# EAGLE board Ls board v88 (EAGLE 9.7.0)
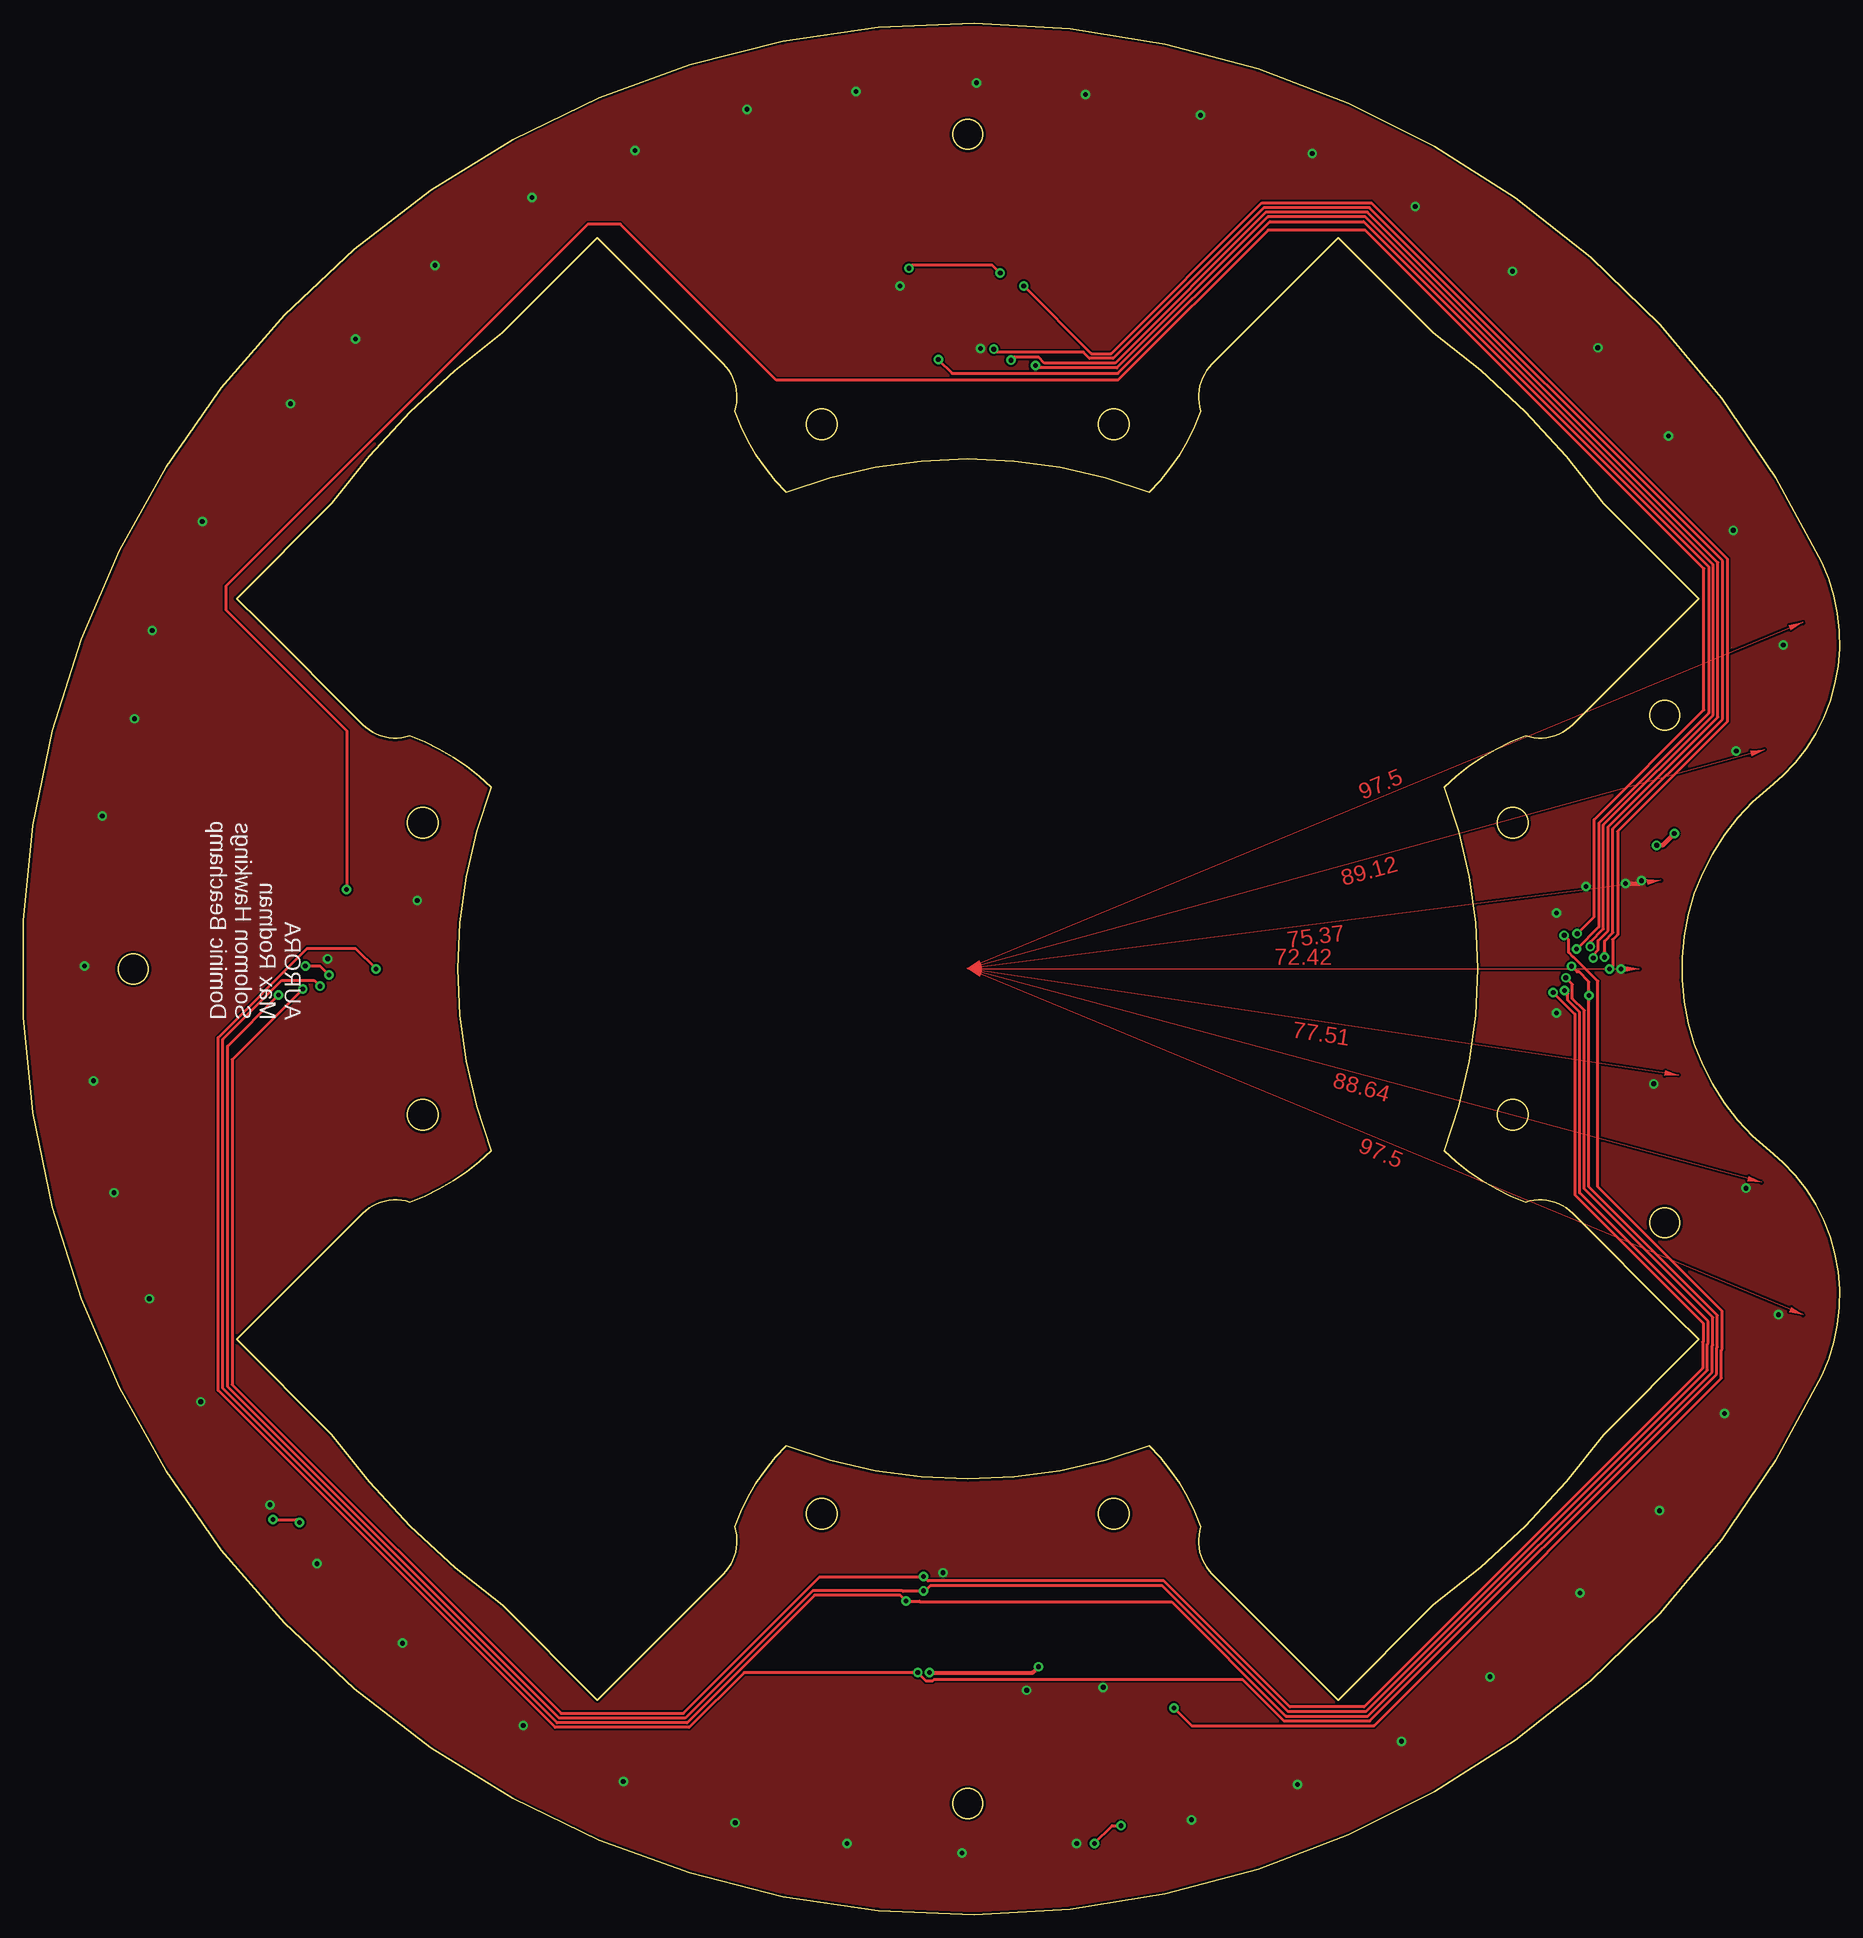
[diagram p0: board, top side]
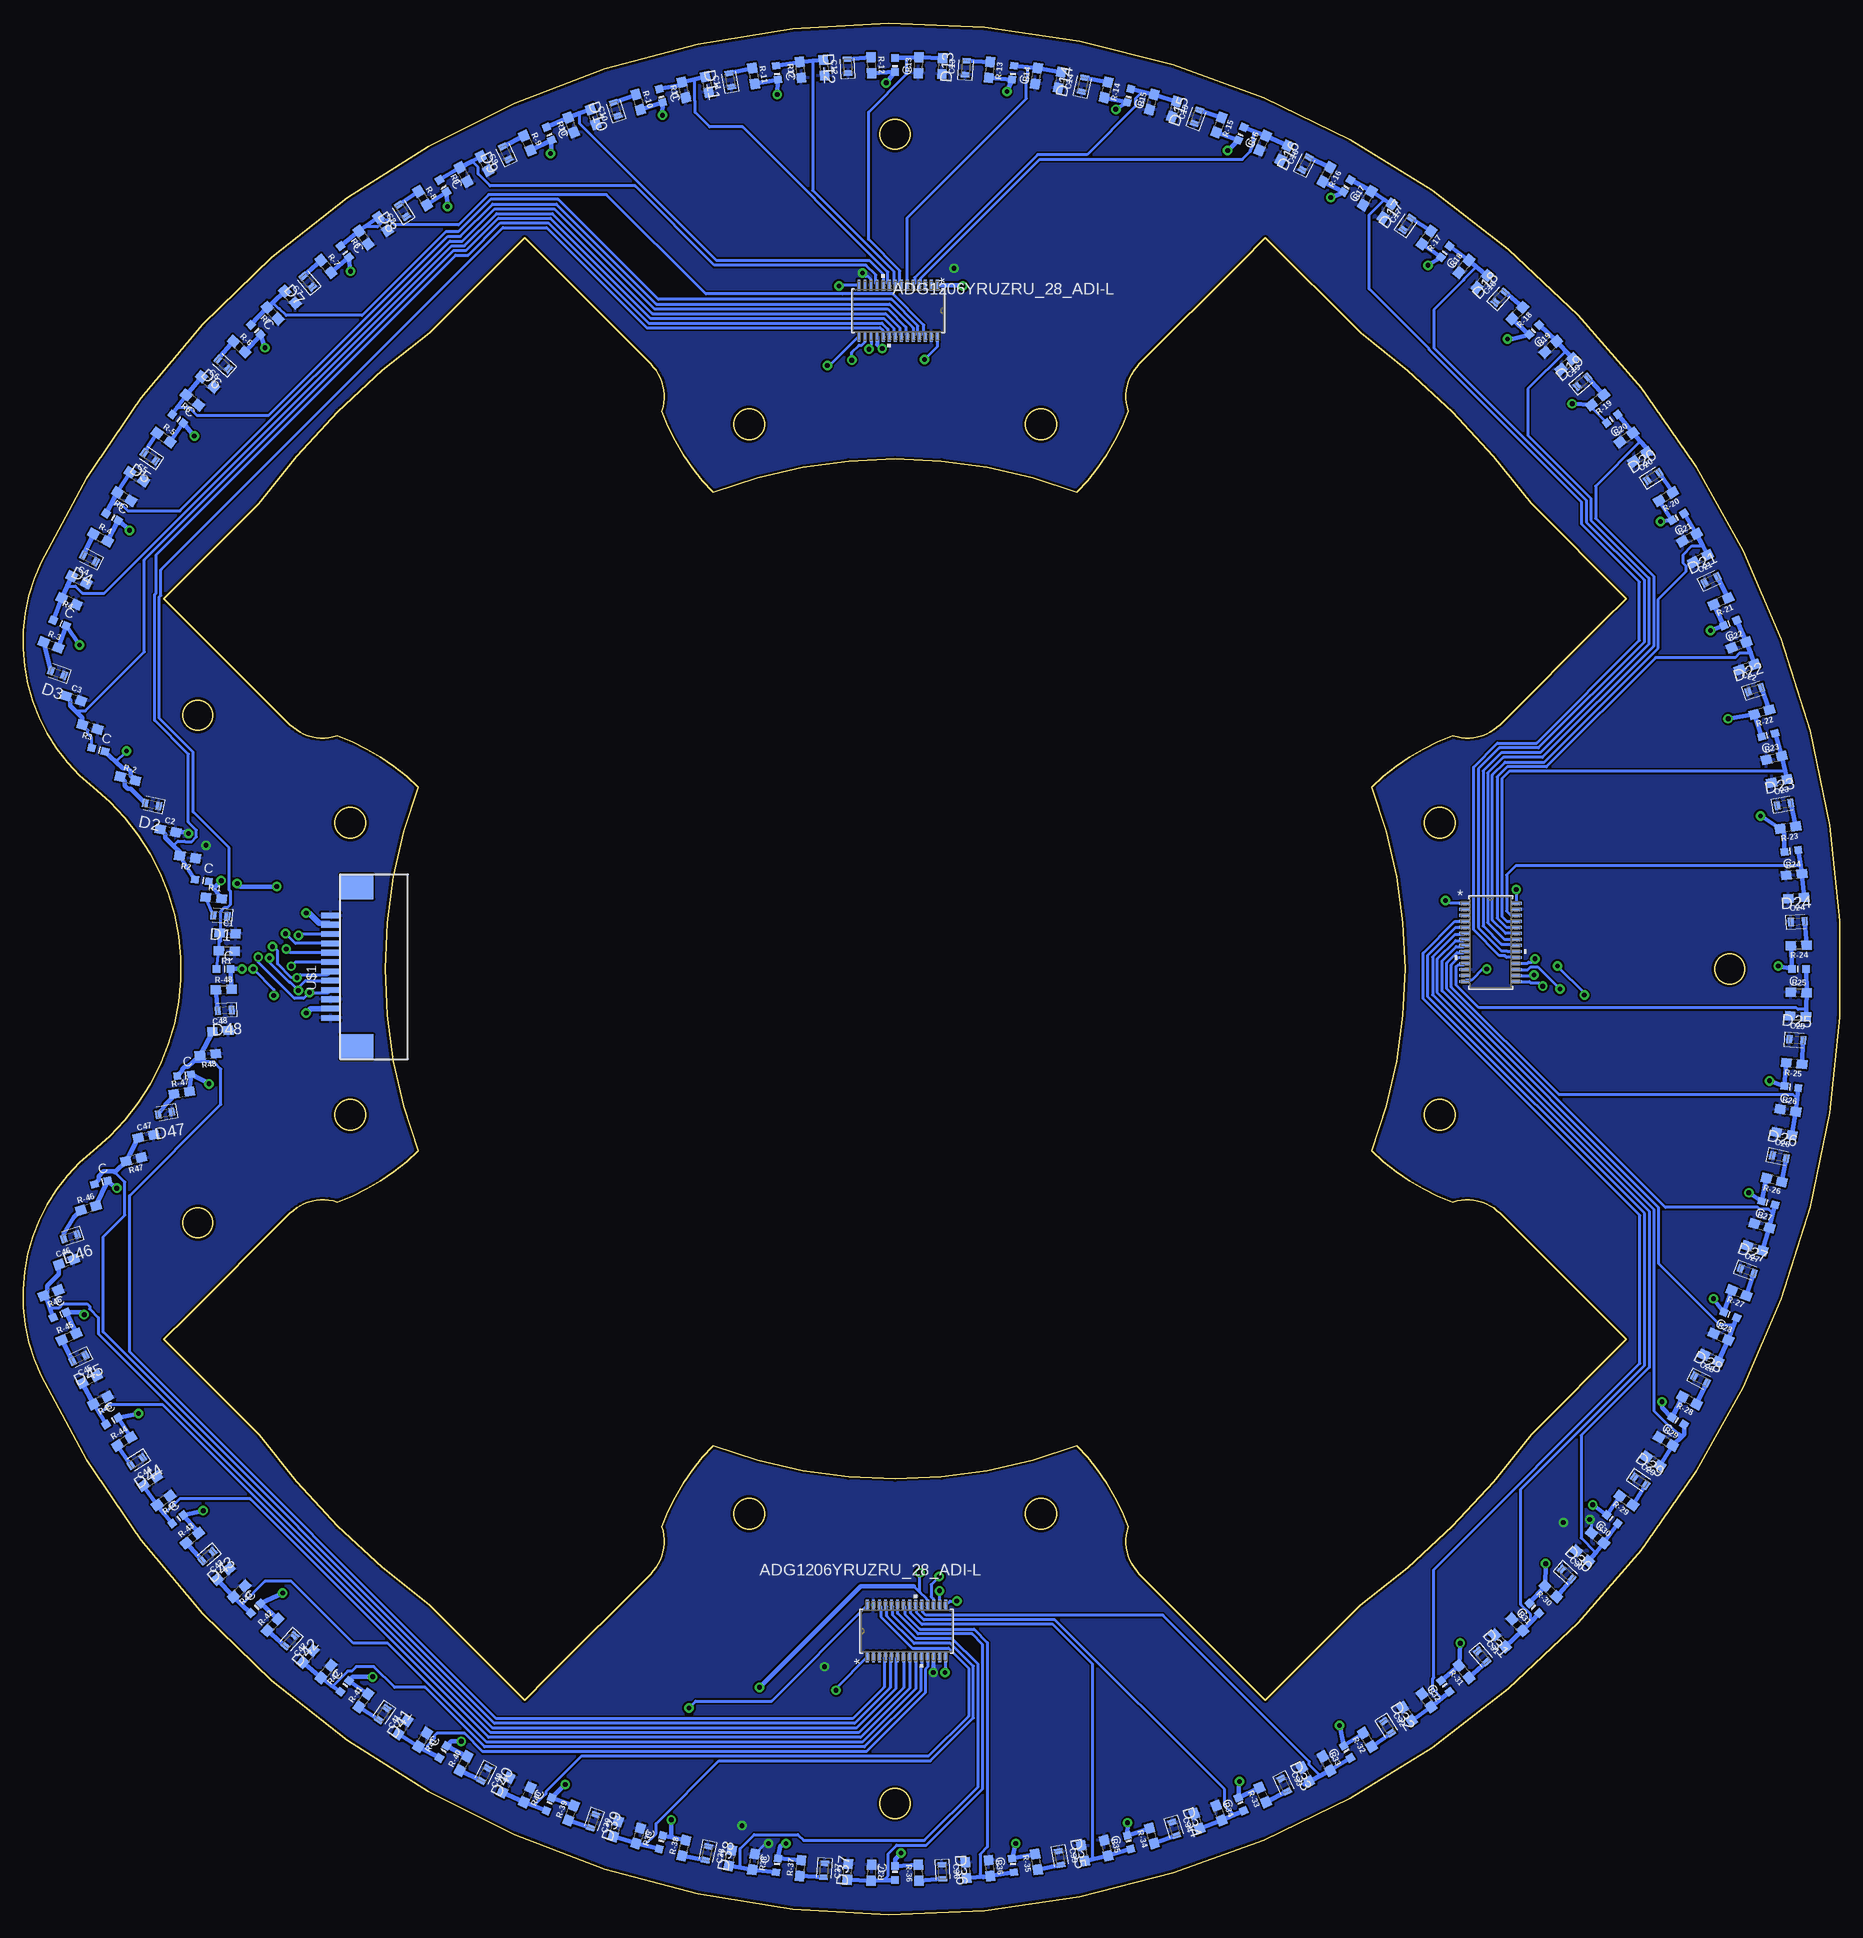
[diagram p1: board, bottom side, seen from below]

Size 195.89 x 204 mm. Coordinates in mm from the lower left corner, seen from the top.
Outline: 50.47,82.42 arc-25 41.7,76.86 arc63 36.62,75.64 23.03,62.05 33.22,51.85 arc18 51.72,33.35 61.92,23.16 75.51,36.75 arc63 76.73,41.83 arc-25 82.29,50.6 arc42 121.45,50.6 arc-25 127.01,41.83 arc63 128.23,36.75 139.29,25.68 arc0 139.3,25.68 139.29,25.68 141.82,23.16 152.07,33.41 arc18 170.46,51.79 180.71,62.05 178.19,64.57 178.18,64.57 arc0 178.18,64.57 167.12,75.64 arc63 162.03,76.86 arc-25 153.27,82.42 arc42 153.27,121.58 arc-25 162.03,127.14 arc63 167.12,128.36 180.71,141.95 170.47,152.19 arc18 152.05,170.61 141.82,180.84 128.23,167.25 arc63 127.01,162.16 arc-25 121.45,153.4 arc42 82.29,153.4 arc-25 76.73,162.16 arc63 75.51,167.25 64.44,178.32
Outline: 50.47,82.42 50.47,82.42
Outline: 50.47,121.58 arc42 50.47,82.42
Outline: 50.47,121.58 50.47,121.58
Outline: 50.47,121.58 arc25 41.7,127.14 arc-63 36.62,128.36 25.55,139.42 arc0 25.55,139.43 25.55,139.42 23.03,141.95 33.28,152.2 arc-18 51.66,170.59 61.92,180.84 64.44,178.32
Outline: 64.44,178.32 64.44,178.32
Outline: 188.33,121.58 arc77 193.96,145.85 arc309 193.96,58.14 arc77 188.33,82.41 arc-103 188.33,121.58
Outline: circle at 117.61,43.24 radius 1.65
Outline: circle at 101.87,12 radius 1.6
Outline: circle at 43.11,86.25 radius 1.65
Outline: circle at 11.87,102 radius 1.6
Outline: circle at 86.12,160.75 radius 1.65
Outline: circle at 86.12,43.24 radius 1.65
Outline: circle at 177.04,129.36 radius 1.6
Outline: circle at 117.61,160.75 radius 1.65
Outline: circle at 43.11,117.74 radius 1.65
Outline: circle at 177.04,74.64 radius 1.6
Outline: circle at 160.62,117.74 radius 1.65
Outline: circle at 160.62,86.25 radius 1.65
Outline: circle at 101.87,192 radius 1.6
Copper layers (1*16): Top 0.035mm / dielectric 1.5mm / Bottom 0.035mm
Design rules "SparkFun": minimum track width 8mil, minimum drill 20mil, track to track 8mil, track to pad 8mil, pad to pad 8mil, via to via 8mil, smd to smd 8mil, copper to edge 10mil, drill to drill 8mil, minimum pad ring 12mil, minimum via ring 10mil, stop-mask expansion 4mil, vias tented up to drill 25mil, thermal gap 10mil

## Footprints (pad centres in the part's own frame; a part is rotated, then mirrored left to right if it is on the bottom)
0603 = smd 1.1 x 1: 1 -0.85,0; 2 0.85,0
LEDC1608X35N_FLAT-B = smd 0.612 x 0.912: A 0.75,0; C -0.75,0
SMD = smd 0.8 x 0.8: C -0.75,0; E 0.75,0
RU_28_ADI-L = smd 1.168 x 0.305: 1 -2.769,4.225; 2 -2.769,3.575; 3 -2.769,2.925; 4 -2.769,2.275; 5 -2.769,1.625; 6 -2.769,0.975; 7 -2.769,0.325; 8 -2.769,-0.325; 9 -2.769,-0.975; 10 -2.769,-1.625; 11 -2.769,-2.275; 12 -2.769,-2.925; 13 -2.769,-3.575; 14 -2.769,-4.225; 15 2.769,-4.225; 16 2.769,-3.575; 17 2.769,-2.925; 18 2.769,-2.275; 19 2.769,-1.625; 20 2.769,-0.975; 21 2.769,-0.325; 22 2.769,0.325; 23 2.769,0.975; 24 2.769,1.625; 25 2.769,2.275; 26 2.769,2.925; 27 2.769,3.575; 28 2.769,4.225
FPC12 = smd 0.61 x 2.007: 1 -5.518,1.003; 2 -4.515,1.003; 3 -3.512,1.003; 4 -2.508,1.003; 5 -1.505,1.003; 6 -0.502,1.003; 7 0.502,1.003; 8 1.505,1.003; 9 2.508,1.003; 10 3.512,1.003; 11 4.515,1.003; 12 5.518,1.003 | smd 2.667 x 3.607: N/C-1 -8.623,-1.803; N/C-2 8.623,-1.803

## Placement (x,y rotation side)
C1  0.1uF  [0603]  173.83,105.83 357 bottom
C2  0.1uF  [0603]  180.27,116.91 349.5 bottom
C3  0.1uF  [0603]  190.47,131.17 342 bottom
C4  0.1uF  [0603]  189.87,143.97 334.5 bottom
C5  0.1uF  [0603]  183.64,155.1 327 bottom
C6  0.1uF  [0603]  176.01,165.32 319.5 bottom
C7  0.1uF  [0603]  167.11,174.45 312 bottom
C8  0.1uF  [0603]  157.09,182.35 304.5 bottom
C9  0.1uF  [0603]  146.13,188.87 297 bottom
C10  0.1uF  [0603]  134.41,193.91 289.5 bottom
C11  0.1uF  [0603]  122.14,197.37 282 bottom
C12  0.1uF  [0603]  109.52,199.2 274.5 bottom
C13  0.1uF  [0603]  96.77,199.36 267 bottom
C14  0.1uF  [0603]  84.1,197.86 259.5 bottom
C15  0.1uF  [0603]  71.74,194.73 252 bottom
C16  0.1uF  [0603]  59.89,190 244.5 bottom
C17  0.1uF  [0603]  48.77,183.77 237 bottom
C18  0.1uF  [0603]  38.55,176.14 229.5 bottom
C19  0.1uF  [0603]  29.41,167.24 222 bottom
C20  0.1uF  [0603]  21.52,157.22 214.5 bottom
C21  0.1uF  [0603]  14.99,146.26 207 bottom
C22  0.1uF  [0603]  9.96,134.54 199.5 bottom
C23  0.1uF  [0603]  6.5,122.27 192 bottom
C24  0.1uF  [0603]  4.67,109.65 184.5 bottom
C25  0.1uF  [0603]  4.5,96.89 177 bottom
C26  0.1uF  [0603]  6,84.23 169.5 bottom
C27  0.1uF  [0603]  9.14,71.87 162 bottom
C28  0.1uF  [0603]  13.87,60.02 154.5 bottom
C29  0.1uF  [0603]  20.1,48.9 147 bottom
C30  0.1uF  [0603]  27.73,38.68 139.5 bottom
C31  0.1uF  [0603]  36.63,29.54 132 bottom
C32  0.1uF  [0603]  46.64,21.65 124.5 bottom
C33  0.1uF  [0603]  57.6,15.12 117 bottom
C34  0.1uF  [0603]  69.32,10.09 109.5 bottom
C35  0.1uF  [0603]  81.6,6.63 102 bottom
C36  0.1uF  [0603]  94.22,4.8 94.5 bottom
C37  0.1uF  [0603]  106.97,4.63 87 bottom
C38  0.1uF  [0603]  119.64,6.13 79.5 bottom
C39  0.1uF  [0603]  132,9.27 72 bottom
C40  0.1uF  [0603]  143.84,14 64.5 bottom
C41  0.1uF  [0603]  154.97,20.23 57 bottom
C42  0.1uF  [0603]  165.19,27.86 49.5 bottom
C43  0.1uF  [0603]  174.32,36.76 42 bottom
C44  0.1uF  [0603]  182.22,46.77 34.5 bottom
C45  0.1uF  [0603]  188.74,57.73 27 bottom
C46  0.1uF  [0603]  191.24,70.4 19.5 bottom
C47  0.1uF  [0603]  182.63,83.95 12 bottom
C48  0.1uF  [0603]  174.62,95.3 4.5 bottom
D1  [LEDC1608X35N_FLAT-B]  174.62,107.74 175.5 bottom
D2  [LEDC1608X35N_FLAT-B]  182,119.73 168 bottom
D3  [LEDC1608X35N_FLAT-B]  192.19,133.91 160.5 bottom
D4  [LEDC1608X35N_FLAT-B]  188.74,146.26 153 bottom
D5  [LEDC1608X35N_FLAT-B]  182.22,157.22 145.5 bottom
D6  [LEDC1608X35N_FLAT-B]  174.32,167.24 138 bottom
D7  [LEDC1608X35N_FLAT-B]  165.19,176.14 130.5 bottom
D8  [LEDC1608X35N_FLAT-B]  154.97,183.77 123 bottom
D9  [LEDC1608X35N_FLAT-B]  143.84,190 115.5 bottom
D10  [LEDC1608X35N_FLAT-B]  132,194.73 108 bottom
D11  [LEDC1608X35N_FLAT-B]  119.64,197.86 100.5 bottom
D12  [LEDC1608X35N_FLAT-B]  106.97,199.36 93 bottom
D13  [LEDC1608X35N_FLAT-B]  94.22,199.2 85.5 bottom
D14  [LEDC1608X35N_FLAT-B]  81.6,197.37 78 bottom
D15  [LEDC1608X35N_FLAT-B]  69.32,193.91 70.5 bottom
D16  [LEDC1608X35N_FLAT-B]  57.6,188.87 63 bottom
D17  [LEDC1608X35N_FLAT-B]  46.64,182.35 55.5 bottom
D18  [LEDC1608X35N_FLAT-B]  36.63,174.45 48 bottom
D19  [LEDC1608X35N_FLAT-B]  27.73,165.32 40.5 bottom
D20  [LEDC1608X35N_FLAT-B]  20.1,155.1 33 bottom
D21  [LEDC1608X35N_FLAT-B]  13.87,143.97 25.5 bottom
D22  [LEDC1608X35N_FLAT-B]  9.14,132.13 18 bottom
D23  [LEDC1608X35N_FLAT-B]  6,119.77 10.5 bottom
D24  [LEDC1608X35N_FLAT-B]  4.5,107.1 3 bottom
D25  [LEDC1608X35N_FLAT-B]  4.67,94.35 355.5 bottom
D26  [LEDC1608X35N_FLAT-B]  6.5,81.73 348 bottom
D27  [LEDC1608X35N_FLAT-B]  9.96,69.45 340.5 bottom
D28  [LEDC1608X35N_FLAT-B]  14.99,57.73 333 bottom
D29  [LEDC1608X35N_FLAT-B]  21.52,46.77 325.5 bottom
D30  [LEDC1608X35N_FLAT-B]  29.41,36.76 318 bottom
D31  [LEDC1608X35N_FLAT-B]  38.55,27.86 310.5 bottom
D32  [LEDC1608X35N_FLAT-B]  48.77,20.23 303 bottom
D33  [LEDC1608X35N_FLAT-B]  59.89,14 295.5 bottom
D34  [LEDC1608X35N_FLAT-B]  71.74,9.27 288 bottom
D35  [LEDC1608X35N_FLAT-B]  84.1,6.13 280.5 bottom
D36  [LEDC1608X35N_FLAT-B]  96.77,4.63 273 bottom
D37  [LEDC1608X35N_FLAT-B]  109.52,4.8 265.5 bottom
D38  [LEDC1608X35N_FLAT-B]  122.14,6.63 258 bottom
D39  [LEDC1608X35N_FLAT-B]  134.41,10.09 250.5 bottom
D40  [LEDC1608X35N_FLAT-B]  146.13,15.12 243 bottom
D41  [LEDC1608X35N_FLAT-B]  157.09,21.65 235.5 bottom
D42  [LEDC1608X35N_FLAT-B]  167.11,29.54 228 bottom
D43  [LEDC1608X35N_FLAT-B]  176.01,38.68 220.5 bottom
D44  [LEDC1608X35N_FLAT-B]  183.64,48.9 213 bottom
D45  [LEDC1608X35N_FLAT-B]  189.87,60.02 205.5 bottom
D46  [LEDC1608X35N_FLAT-B]  190.79,73.14 198 bottom
D47  [LEDC1608X35N_FLAT-B]  180.59,86.45 190.5 bottom
D48  [LEDC1608X35N_FLAT-B]  174.15,97.53 183 bottom
LS1  ALS  [SMD]  174.29,102 180 bottom
LS2  ALS  [SMD]  176.63,111.55 172.5 bottom
LS3  ALS  [SMD]  187.79,125.64 165 bottom
LS4  ALS  [SMD]  191.95,139.31 157.5 bottom
LS5  ALS  [SMD]  186.31,150.75 150 bottom
LS6  ALS  [SMD]  179.22,161.35 142.5 bottom
LS7  ALS  [SMD]  170.81,170.94 135 bottom
LS8  ALS  [SMD]  161.22,179.35 127.5 bottom
LS9  ALS  [SMD]  150.62,186.44 120 bottom
LS10  ALS  [SMD]  139.18,192.08 112.5 bottom
LS11  ALS  [SMD]  127.1,196.18 105 bottom
LS12  ALS  [SMD]  114.59,198.66 97.5 bottom
LS13  ALS  [SMD]  101.87,199.5 90 bottom
LS14  ALS  [SMD]  89.14,198.66 82.5 bottom
LS15  ALS  [SMD]  76.63,196.18 75 bottom
LS16  ALS  [SMD]  64.56,192.08 67.5 bottom
LS17  ALS  [SMD]  53.12,186.44 60 bottom
LS18  ALS  [SMD]  42.51,179.35 52.5 bottom
LS19  ALS  [SMD]  32.93,170.94 45 bottom
LS20  ALS  [SMD]  24.52,161.35 37.5 bottom
LS21  ALS  [SMD]  17.43,150.75 30 bottom
LS22  ALS  [SMD]  11.79,139.31 22.5 bottom
LS23  ALS  [SMD]  7.69,127.23 15 bottom
LS24  ALS  [SMD]  5.2,114.72 7.5 bottom
LS25  ALS  [SMD]  4.37,102 0 bottom
LS26  ALS  [SMD]  5.2,89.27 352.5 bottom
LS27  ALS  [SMD]  7.69,76.76 345 bottom
LS28  ALS  [SMD]  11.79,64.69 337.5 bottom
LS29  ALS  [SMD]  17.43,53.25 330 bottom
LS30  ALS  [SMD]  24.52,42.64 322.5 bottom
LS31  ALS  [SMD]  32.93,33.05 315 bottom
LS32  ALS  [SMD]  42.51,24.65 307.5 bottom
LS33  ALS  [SMD]  53.12,17.56 300 bottom
LS34  ALS  [SMD]  64.56,11.92 292.5 bottom
LS35  ALS  [SMD]  76.63,7.82 285 bottom
LS36  ALS  [SMD]  89.14,5.33 277.5 bottom
LS37  ALS  [SMD]  101.87,4.5 270 bottom
LS38  ALS  [SMD]  114.59,5.33 262.5 bottom
LS39  ALS  [SMD]  127.1,7.82 255 bottom
LS40  ALS  [SMD]  139.18,11.92 247.5 bottom
LS41  ALS  [SMD]  150.62,17.56 240 bottom
LS42  ALS  [SMD]  161.22,24.65 232.5 bottom
LS43  ALS  [SMD]  170.81,33.05 225 bottom
LS44  ALS  [SMD]  179.22,42.64 217.5 bottom
LS45  ALS  [SMD]  186.31,53.25 210 bottom
LS46  ALS  [SMD]  191.95,64.69 202.5 bottom
LS47  ALS  [SMD]  187.47,78.99 195 bottom
LS48  ALS  [SMD]  178.53,90.54 187.5 bottom
MULTIPLEXER  ADG1206YRUZRU_28_ADI-L  [RU_28_ADI-L]  101.53,172.98 270 bottom
MULTIPLEXER1  ADG1206YRUZRU_28_ADI-L  [RU_28_ADI-L]  37.64,104.86 0 bottom
MULTIPLEXER2  ADG1206YRUZRU_28_ADI-L  [RU_28_ADI-L]  100.62,30.59 90 bottom
R1  33k  [0603]  173.93,103.91 178.5 bottom
R2  33k  [0603]  178.17,114.07 171 bottom
R3  33k  [0603]  188.69,128.1 163.5 bottom
R4  33k  [0603]  190.94,141.65 156 bottom
R5  33k  [0603]  185,152.94 148.5 bottom
R6  33k  [0603]  177.64,163.36 141 bottom
R7  33k  [0603]  168.98,172.72 133.5 bottom
R8  33k  [0603]  159.18,180.88 126 bottom
R9  33k  [0603]  148.39,187.68 118.5 bottom
R10  33k  [0603]  136.81,193.02 111 bottom
R11  33k  [0603]  124.63,196.8 103.5 bottom
R12  33k  [0603]  112.06,198.96 96 bottom
R13  33k  [0603]  99.32,199.46 88.5 bottom
R14  33k  [0603]  86.62,198.3 81 bottom
R15  33k  [0603]  74.18,195.48 73.5 bottom
R16  33k  [0603]  62.21,191.07 66 bottom
R17  33k  [0603]  50.92,185.13 58.5 bottom
R18  33k  [0603]  40.51,177.77 51 bottom
R19  33k  [0603]  31.14,169.11 43.5 bottom
R20  33k  [0603]  22.99,159.31 36 bottom
R21  33k  [0603]  16.18,148.52 28.5 bottom
R22  33k  [0603]  10.84,136.94 21 bottom
R23  33k  [0603]  7.06,124.76 13.5 bottom
R24  33k  [0603]  4.9,112.19 6 bottom
R25  33k  [0603]  4.4,99.45 358.5 bottom
R26  33k  [0603]  5.57,86.75 351 bottom
R27  33k  [0603]  8.38,74.31 343.5 bottom
R28  33k  [0603]  12.8,62.34 336 bottom
R29  33k  [0603]  18.74,51.05 328.5 bottom
R30  33k  [0603]  26.1,40.64 321 bottom
R31  33k  [0603]  34.75,31.27 313.5 bottom
R32  33k  [0603]  44.56,23.12 306 bottom
R33  33k  [0603]  55.34,16.31 298.5 bottom
R34  33k  [0603]  66.93,10.97 291 bottom
R35  33k  [0603]  79.11,7.19 283.5 bottom
R36  33k  [0603]  91.68,5.03 276 bottom
R37  33k  [0603]  104.42,4.53 268.5 bottom
R38  33k  [0603]  117.12,5.7 261 bottom
R39  33k  [0603]  129.56,8.51 253.5 bottom
R40  33k  [0603]  141.52,12.93 246 bottom
R41  33k  [0603]  152.81,18.87 238.5 bottom
R42  33k  [0603]  163.23,26.23 231 bottom
R43  33k  [0603]  172.59,34.88 223.5 bottom
R44  33k  [0603]  180.75,44.69 216 bottom
R45  33k  [0603]  187.55,55.47 208.5 bottom
R46  33k  [0603]  192.89,67.06 201 bottom
R47  33k  [0603]  183.97,81.46 193.5 bottom
R48  33k  [0603]  175.97,92.76 186 bottom
R-1  330  [0603]  175.34,109.65 354 bottom
R-2  330  [0603]  184.61,122.54 346.5 bottom
R-3  330  [0603]  192.89,136.94 339 bottom
R-4  330  [0603]  187.55,148.52 331.5 bottom
R-5  330  [0603]  180.75,159.31 324 bottom
R-6  330  [0603]  172.59,169.11 316.5 bottom
R-7  330  [0603]  163.23,177.77 309 bottom
R-8  330  [0603]  152.81,185.13 301.5 bottom
R-9  330  [0603]  141.52,191.07 294 bottom
R-10  330  [0603]  129.56,195.48 286.5 bottom
R-11  330  [0603]  117.12,198.3 279 bottom
R-12  330  [0603]  104.42,199.46 271.5 bottom
R-13  330  [0603]  91.68,198.96 264 bottom
R-14  330  [0603]  79.11,196.8 256.5 bottom
R-15  330  [0603]  66.93,193.02 249 bottom
R-16  330  [0603]  55.34,187.68 241.5 bottom
R-17  330  [0603]  44.56,180.88 234 bottom
R-18  330  [0603]  34.75,172.72 226.5 bottom
R-19  330  [0603]  26.1,163.36 219 bottom
R-20  330  [0603]  18.74,152.94 211.5 bottom
R-21  330  [0603]  12.8,141.65 204 bottom
R-22  330  [0603]  8.38,129.69 196.5 bottom
R-23  330  [0603]  5.57,117.25 189 bottom
R-24  330  [0603]  4.4,104.55 181.5 bottom
R-25  330  [0603]  4.9,91.81 174 bottom
R-26  330  [0603]  7.06,79.24 166.5 bottom
R-27  330  [0603]  10.84,67.06 159 bottom
R-28  330  [0603]  16.18,55.47 151.5 bottom
R-29  330  [0603]  22.99,44.69 144 bottom
R-30  330  [0603]  31.14,34.88 136.5 bottom
R-31  330  [0603]  40.51,26.23 129 bottom
R-32  330  [0603]  50.92,18.87 121.5 bottom
R-33  330  [0603]  62.21,12.93 114 bottom
R-34  330  [0603]  74.18,8.51 106.5 bottom
R-35  330  [0603]  86.62,5.7 99 bottom
R-36  330  [0603]  99.32,4.53 91.5 bottom
R-37  330  [0603]  112.06,5.03 84 bottom
R-38  330  [0603]  124.63,7.19 76.5 bottom
R-39  330  [0603]  136.81,10.97 69 bottom
R-40  330  [0603]  148.39,16.31 61.5 bottom
R-41  330  [0603]  159.18,23.12 54 bottom
R-42  330  [0603]  168.98,31.27 46.5 bottom
R-43  330  [0603]  177.64,40.64 39 bottom
R-44  330  [0603]  185,51.05 31.5 bottom
R-45  330  [0603]  190.94,62.34 24 bottom
R-46  330  [0603]  188.85,76.23 16.5 bottom
R-47  330  [0603]  178.8,88.65 9 bottom
R-48  330  [0603]  174.25,99.76 1.5 bottom
U$1  FPC12  [FPC12]  161.72,102.25 90 bottom

## Library data of the parts
C1-C48 = SparkFun-Capacitors; PROD_ID: CAP-08390
D1-D48 = LED; CATEGORY: LED; COLOR: BLUE; DESCRIPTION: CHIP LED FLAT; SUB-CATEGORY: CHIP; TYPE: FLAT_TOP
LS1-LS48 = phototransitor-ALS-PT19-315CL177TR8
MULTIPLEXER MULTIPLEXER1 MULTIPLEXER2 = ADG1206; COPYRIGHT: Copyright (C) 2022 Ultra Librarian. All rights reserved.; MANUFACTURER_PART_NUMBER: ADG1206YRUZ; MFR_NAME: Analog Devices Inc
R1-R48 = SparkFun-Resistors; PROD_ID: RES-08416
R-1-R-48 = SparkFun-Resistors; PROD_ID: RES-08968
U$1 = FFC

## Nets
3.3V: LS1.C LS2.C LS3.C LS4.C LS5.C LS6.C LS7.C LS8.C LS9.C LS10.C LS11.C LS12.C LS13.C LS14.C LS15.C LS16.C LS17.C LS18.C LS19.C LS20.C LS21.C LS22.C LS23.C LS24.C LS25.C LS26.C LS27.C LS28.C LS29.C LS30.C LS31.C LS32.C LS33.C LS34.C LS35.C LS36.C LS37.C LS38.C LS39.C LS40.C LS41.C LS42.C LS43.C LS44.C LS45.C LS46.C LS47.C LS48.C MULTIPLEXER1.1 MULTIPLEXER1.18 MULTIPLEXER2.1 MULTIPLEXER2.18 MULTIPLEXER.1 MULTIPLEXER.18 R-1.2 R-2.2 R-3.2 R-4.2 R-5.2 R-6.2 R-7.2 R-8.2 R-9.2 R-10.2 R-11.2 R-12.2 R-13.2 R-14.2 R-15.2 R-16.2 R-17.2 R-18.2 R-19.2 R-20.2 R-21.2 R-22.2 R-23.2 R-24.2 R-25.2 R-26.2 R-27.2 R-28.2 R-29.2 R-30.2 R-31.2 R-32.2 R-33.2 R-34.2 R-35.2 R-36.2 R-37.2 R-38.2 R-39.2 R-40.2 R-41.2 R-42.2 R-43.2 R-44.2 R-45.2 R-46.2 R-47.2 R-48.2 U$1.2 U$1.11
GND: C1.2 C2.2 C3.2 C4.2 C5.2 C6.2 C7.2 C8.2 C9.2 C10.2 C11.2 C12.2 C13.2 C14.2 C15.2 C16.2 C17.2 C18.2 C19.2 C20.2 C21.2 C22.2 C23.2 C24.2 C25.2 C26.2 C27.2 C28.2 C29.2 C30.2 C31.2 C32.2 C33.2 C34.2 C35.2 C36.2 C37.2 C38.2 C39.2 C40.2 C41.2 C42.2 C43.2 C44.2 C45.2 C46.2 C47.2 C48.2 D1.C D2.C D3.C D4.C D5.C D6.C D7.C D8.C D9.C D10.C D11.C D12.C D13.C D14.C D15.C D16.C D17.C D18.C D19.C D20.C D21.C D22.C D23.C D24.C D25.C D26.C D27.C D28.C D29.C D30.C D31.C D32.C D33.C D34.C D35.C D36.C D37.C D38.C D39.C D40.C D41.C D42.C D43.C D44.C D45.C D46.C D47.C D48.C MULTIPLEXER1.12 MULTIPLEXER1.27 MULTIPLEXER2.12 MULTIPLEXER2.27 MULTIPLEXER.12 MULTIPLEXER.27 R1.1 R2.1 R3.1 R4.1 R5.1 R6.1 R7.1 R8.1 R9.1 R10.1 R11.1 R12.1 R13.1 R14.1 R15.1 R16.1 R17.1 R18.1 R19.1 R20.1 R21.1 R22.1 R23.1 R24.1 R25.1 R26.1 R27.1 R28.1 R29.1 R30.1 R31.1 R32.1 R33.1 R34.1 R35.1 R36.1 R37.1 R38.1 R39.1 R40.1 R41.1 R42.1 R43.1 R44.1 R45.1 R46.1 R47.1 R48.1 U$1.1 U$1.3 U$1.12
LS0: MULTIPLEXER1.17 MULTIPLEXER2.17 MULTIPLEXER.17 U$1.4
LS1: MULTIPLEXER1.16 MULTIPLEXER2.16 MULTIPLEXER.16 U$1.5
LS2: MULTIPLEXER1.15 MULTIPLEXER2.15 MULTIPLEXER.15 U$1.6
LS3: MULTIPLEXER1.14 MULTIPLEXER2.14 MULTIPLEXER.14 U$1.7
LS-1: C1.1 LS1.E MULTIPLEXER.19 R1.2
LS-2: C2.1 LS2.E MULTIPLEXER.20 R2.2
LS-3: C3.1 LS3.E MULTIPLEXER.21 R3.2
LS-4: C4.1 LS4.E MULTIPLEXER.22 R4.2
LS-5: C5.1 LS5.E MULTIPLEXER.23 R5.2
LS-6: C6.1 LS6.E MULTIPLEXER.24 R6.2
LS-7: C7.1 LS7.E MULTIPLEXER.25 R7.2
LS-8: C8.1 LS8.E MULTIPLEXER.26 R8.2
LS-9: C9.1 LS9.E MULTIPLEXER.11 R9.2
LS-10: C10.1 LS10.E MULTIPLEXER.10 R10.2
LS-11: C11.1 LS11.E MULTIPLEXER.9 R11.2
LS-12: C12.1 LS12.E MULTIPLEXER.8 R12.2
LS-13: C13.1 LS13.E MULTIPLEXER.7 R13.2
LS-14: C14.1 LS14.E MULTIPLEXER.6 R14.2
LS-15: C15.1 LS15.E MULTIPLEXER.5 R15.2
LS-16: C16.1 LS16.E MULTIPLEXER.4 R16.2
LS-17: C17.1 LS17.E MULTIPLEXER1.19 R17.2
LS-18: C18.1 LS18.E MULTIPLEXER1.20 R18.2
LS-19: C19.1 LS19.E MULTIPLEXER1.21 R19.2
LS-20: C20.1 LS20.E MULTIPLEXER1.22 R20.2
LS-21: C21.1 LS21.E MULTIPLEXER1.23 R21.2
LS-22: C22.1 LS22.E MULTIPLEXER1.24 R22.2
LS-23: C23.1 LS23.E MULTIPLEXER1.25 R23.2
LS-24: C24.1 LS24.E MULTIPLEXER1.26 R24.2
LS-25: C25.1 LS25.E MULTIPLEXER1.11 R25.2
LS-26: C26.1 LS26.E MULTIPLEXER1.10 R26.2
LS-27: C27.1 LS27.E MULTIPLEXER1.9 R27.2
LS-28: C28.1 LS28.E MULTIPLEXER1.8 R28.2
LS-29: C29.1 LS29.E MULTIPLEXER1.7 R29.2
LS-30: C30.1 LS30.E MULTIPLEXER1.6 R30.2
LS-31: C31.1 LS31.E MULTIPLEXER1.5 R31.2
LS-32: C32.1 LS32.E MULTIPLEXER1.4 R32.2
LS-33: C33.1 LS33.E MULTIPLEXER2.19 R33.2
LS-34: C34.1 LS34.E MULTIPLEXER2.20 R34.2
LS-35: C35.1 LS35.E MULTIPLEXER2.21 R35.2
LS-36: C36.1 LS36.E MULTIPLEXER2.22 R36.2
LS-37: C37.1 LS37.E MULTIPLEXER2.23 R37.2
LS-38: C38.1 LS38.E MULTIPLEXER2.24 R38.2
LS-39: C39.1 LS39.E MULTIPLEXER2.25 R39.2
LS-40: C40.1 LS40.E MULTIPLEXER2.26 R40.2
LS-41: C41.1 LS41.E MULTIPLEXER2.11 R41.2
LS-42: C42.1 LS42.E MULTIPLEXER2.10 R42.2
LS-43: C43.1 LS43.E MULTIPLEXER2.9 R43.2
LS-44: C44.1 LS44.E MULTIPLEXER2.8 R44.2
LS-45: C45.1 LS45.E MULTIPLEXER2.7 R45.2
LS-46: C46.1 LS46.E MULTIPLEXER2.6 R46.2
LS-47: C47.1 LS47.E MULTIPLEXER2.5 R47.2
LS-48: C48.1 LS48.E MULTIPLEXER2.4 R48.2
LSOUT: MULTIPLEXER.28 U$1.8
LSOUT2: MULTIPLEXER1.28 U$1.9
LSOUT3: MULTIPLEXER2.28 U$1.10
N$1: D1.A R-1.1
N$2: D2.A R-2.1
N$3: D3.A R-3.1
N$4: D4.A R-4.1
N$5: D5.A R-5.1
N$6: D6.A R-6.1
N$7: D7.A R-7.1
N$8: D8.A R-8.1
N$9: D9.A R-9.1
N$10: D10.A R-10.1
N$11: D11.A R-11.1
N$12: D12.A R-12.1
N$13: D13.A R-13.1
N$14: D14.A R-14.1
N$15: D15.A R-15.1
N$16: D16.A R-16.1
N$19: D17.A R-17.1
N$22: D18.A R-18.1
N$23: D19.A R-19.1
N$24: D20.A R-20.1
N$25: D21.A R-21.1
N$26: D22.A R-22.1
N$27: D23.A R-23.1
N$28: D24.A R-24.1
N$29: D25.A R-25.1
N$30: D26.A R-26.1
N$31: D27.A R-27.1
N$32: D33.A R-33.1
N$33: D34.A R-34.1
N$34: D35.A R-35.1
N$35: D36.A R-36.1
N$36: D37.A R-37.1
N$37: D28.A R-28.1
N$38: D29.A R-29.1
N$39: D30.A R-30.1
N$40: D31.A R-31.1
N$41: D32.A R-32.1
N$46: D38.A R-38.1
N$47: D39.A R-39.1
N$48: D40.A R-40.1
N$49: D41.A R-41.1
N$50: D42.A R-42.1
N$51: D43.A R-43.1
N$52: D44.A R-44.1
N$53: D45.A R-45.1
N$54: D46.A R-46.1
N$55: D47.A R-47.1
N$56: D48.A R-48.1

## Tracks (layer width: path | path; a pad name or v marks a point on that pad's centre or on a via)
3.3V  (via drill 0.51)
  Top 0.508: v174.54,111.52 174.54,111.48 174.26,111.2 v172.81,111.2
  Bottom 0.305: MULTIPLEXER1.1 41.97,109.09 42.27,109.39 v42.49,109.39 | MULTIPLEXER2.1 108.22,24.45 v108.22,24.21 | LS20.C 26.76,162.54 R-19.2 | 185.89,124.33 184.74,125.48 v184.74,125.49 | MULTIPLEXER1.18 33.68,102.59 33.54,102.73 33.19,102.73 v32.84,103.09 | 99.19,34.8 v99.19,36.88 | MULTIPLEXER2.18 98.34,33.94 98.46,34.05 98.46,34.06 99.19,34.8 | 99.19,34.8 99.84,35.45
  Bottom 0.406: MULTIPLEXER.18 103.8,169.34 103.38,168.92 v103.25,168.92
  Bottom 0.508: LS2.C 175.34,110.71 | 175.34,110.71 R-1.2 174.49,109.61 | LS3.C 185.89,124.33 185.17,123.66 184.66,123.66 184.29,123.29 184.29,122.85 R-2.2 | R-3.2 LS4.C v189.82,136.92 | R-4.2 LS5.C v184.42,149.3 | R-5.2 LS6.C v177.43,159.47 | R-6.2 LS7.C v169.81,168.99 | R-7.2 LS8.C v160.6,177.25 | R-8.2 LS9.C v150.13,184.23 | R-9.2 LS10.C v139.02,189.95 | R-10.2 LS11.C v126.95,194.07 | R-11.2 LS12.C v114.57,196.29 | R-12.2 LS13.C v102.82,197.56 | R-13.2 LS14.C v89.8,196.61 | R-14.2 LS15.C v78.06,194.71 | R-15.2 LS16.C v65.99,190.26 | R-16.2 LS17.C v54.88,185.18 | R-17.2 LS18.C v44.4,177.88 | R-18.2 LS19.C 35.19,169.94 v35.83,169.94 | R-19.2 v28.84,162.96 | R-20.2 LS21.C v19.32,150.26 | R-21.2 LS22.C v13.92,138.51 | LS23.C R-22.2 v12.01,128.99 | v8.52,118.51 R-23.2 5.95,116.65 LS24.C | R-24.2 LS25.C v6.62,102.32 | R-25.2 LS26.C v7.57,89.93 | R-26.2 LS27.C v9.79,77.87 | R-27.2 LS28.C v13.6,66.44 | R-28.2 LS29.C 19.15,54.7 v19.15,55.33 | R-29.2 LS30.C v26.62,44.21 | v31.7,37.86 R-30.2 LS31.C | v40.91,29.29 R-31.2 LS32.C | R-32.2 LS33.C v53.92,20.4 | R-33.2 LS34.C v64.72,14.37 | R-34.2 LS35.C v76.79,9.92 | R-35.2 LS36.C v88.85,7.7 | R-36.2 LS37.C 101.87,6.01 v101.23,6.65 | R-37.2 LS38.C 114.25,7.38 v113.62,7.7 | R-38.2 125.99,8.35 | 125.99,8.35 LS39.C | 125.99,8.35 v126,10.24 | R-39.2 LS40.C v137.43,14.05 | R-40.2 LS41.C 149.75,18.7 v148.65,18.7 | R-41.2 LS42.C 160.34,25.66 v158.2,25.66 | R-42.2 LS43.C v167.91,34.69 | R-43.2 LS44.C v176.48,43.58 | R-44.2 LS45.C v183.46,54.05 | R-45.2 LS46.C 189.57,64.97 v189.31,64.72 | R-46.2 LS47.C 185.93,78.36 v185.79,78.36 | R-47.2 LS48.C v175.85,89.61 | R-48.2 LS1.C v172.3,102 | MULTIPLEXER.1 94.66,175.75 v94.56,175.66
  Bottom 0.508: 99.84,35.45 105.55,35.45 v116.47,24.53 | 175.34,110.71 174.54,111.51 v174.54,111.52 | v172.81,111.2 172.49,110.89 v168.54,110.89
  Bottom 0.61: U$1.2 164.87,97.73 v165.37,97.23 | U$1.11 162.91,106.95 163.93,106.95 165.01,108.03 v165.37,108.03
  pour Top: -24.5,-33.89 -24.5,-35.16 -23.86,-33.89
  pour Top: -29.11,-29.93 226.49,-29.93 226.49,245.99 -26.57,245.99 -29.11,-4.37
GND  (via drill 0.51)
  Top 0.305: v105.36,177.04 104.52,177.88 95.84,177.88 v95.52,177.56 | v115.52,7.7 117.42,9.61 v118.38,9.61 | v26.94,42.62 29.48,42.62 v29.79,42.31
  Top 0.406: v97.74,26.12 108.85,26.12 v109.49,26.75
  Top 0.508: v178.07,116.6 176.8,115.33 v176.16,115.33
  Bottom 0.305: v105.36,177.04 105,176.69 104.8,176.69 104.45,176.34 MULTIPLEXER.12 | R38.1 115.82,7.7 v115.52,7.7 | R30.1 26.76,42.44 v26.94,42.62
  Bottom 0.406: MULTIPLEXER2.12 97.74,27.78 v97.74,26.12
  Bottom 0.508: C2.2 178.22,116.75 v178.07,116.6
  pour Bottom: -12.28,-19.45 211.25,-19.45 211.25,231.7 -3.4,231.7 -12.28,-11.04
LS0  (via drill 0.51)
  Top 0.305: v30.15,99.82 22.54,92.21 22.54,57.18 58,21.72 71.19,21.72 85.9,36.43 94.25,36.43 94.88,36.43 97.06,36.43 v97.1,36.47 97.55,36.02 123.01,36.02 136.6,22.43 144.61,22.43 181.12,58.94 181.12,61.77 181.19,61.85 181.19,63.78 167.34,77.64 167.34,97.12 v165,99.46 | v170.54,103.27 170.54,105.01 171.44,105.91 171.44,117.11 183.27,128.95 183.27,146.02 145.18,184.12 133.81,184.12 117.54,167.85 114.99,167.85 114.32,168.52 104.99,168.52 v104.67,168.84
  Bottom 0.305: U$1.4 163,99.46 v165,99.46 165.63,98.82 166.64,98.82 170.54,102.72 v170.54,103.27 | MULTIPLEXER1.17 33.61,101.94 33.33,102.23 32.55,102.23 v30.15,99.82 | v97.1,36.47 97.1,36.46 97.97,35.59 97.97,34.33 97.95,34.31 97.95,34.26 97.69,34.01 MULTIPLEXER2.17 | MULTIPLEXER.17 104.45,169.34 104.67,169.13 v104.67,168.84
LS1  (via drill 0.51)
  Top 0.305: v32.97,101.36 32.02,102.32 v30.43,102.32 | 97.08,34.88 97.1,34.88 97.22,34.88 97.85,35.51 122.8,35.51 136.39,21.92 144.82,21.92 181.62,58.73 181.62,61.56 181.7,61.64 181.7,63.99 167.84,77.85 167.84,97.33 166.57,98.6 166.57,99.34 v166.22,99.69 | 97.08,34.88 v97.08,34.94 | 97.08,34.88 94.86,34.88 94.78,34.97 85.15,34.97 71.4,21.21 57.79,21.21 22.03,56.97 22.03,93.68 v27.53,99.18 | v169.32,103.18 169.32,103.5 169.86,104.05 169.86,105.05 170.93,106.12 170.93,117.32 182.77,129.16 182.77,145.81 144.97,183.61 134.02,183.61 117.75,167.34 110.14,167.34 109.53,167.95 106.82,167.95 v106.52,167.65
  Bottom 0.305: MULTIPLEXER1.16 33.04,101.29 v32.97,101.36 | MULTIPLEXER2.16 97.08,33.4 v97.08,34.94 | U$1.5 165.45,100.74 166.22,99.97 v166.22,99.69 167.07,100.55 167.17,100.55 169.32,102.69 v169.32,103.18 | v30.43,102.32 27.53,99.42 v27.53,99.18 | MULTIPLEXER.16 105.1,169.62 105.45,169.27 105.74,169.27 106.52,168.49 v106.52,167.65
LS2  (via drill 0.51)
  Top 0.305: v32.02,100.14 31.38,100.78 27.91,100.78 21.53,94.4 21.53,56.76 57.58,20.7 71.61,20.7 85.36,34.46 94.56,34.46 v95.2,33.82 96.66,33.82 96.73,33.76 123.84,33.76 136.18,21.42 145.03,21.42 182.13,58.52 182.13,61.35 182.21,61.43 182.21,64.44 168.35,78.29 168.35,97.54 167.08,98.81 167.08,100.33 v166.36,101.05 | v168.99,104.4 168.99,104.91 170.42,106.33 170.42,117.53 182.26,129.37 182.26,145.6 144.76,183.1 134.23,183.1 117.96,166.83 109.42,166.83 v109.17,167.09
  Bottom 0.305: MULTIPLEXER1.15 33.47,100.64 33.33,100.5 32.37,100.5 v32.02,100.14 | MULTIPLEXER2.15 95.93,33.82 v95.2,33.82 | U$1.6 163.06,101.4 166.01,101.4 v166.36,101.05 166.96,101.05 168.45,102.54 168.45,103.94 168.91,104.4 v168.99,104.4 | v109.17,167.09 108.88,167.09 MULTIPLEXER.15
LS3  (via drill 0.51)
  Top 0.305: v38.05,102 35.83,104.22 30.63,104.22 21.02,94.61 21.02,56.55 57.37,20.2 71.82,20.2 77.74,26.12 v96.47,26.12 97.33,25.25 98.1,25.25 98.24,25.39 131.48,25.39 135.97,20.91 145.24,20.91 182.64,58.31 182.64,61.14 182.72,61.21 182.72,64.65 168.86,78.5 v168.86,99.14 168.86,100.61 167.79,101.68 167.59,101.68 v166.98,102.29 | v107.9,175.66 115.2,168.36 117.33,168.36 133.59,184.62 145.39,184.62 183.78,146.23 183.78,128.67 171.95,116.83 171.95,105.7 171.4,105.16 171.4,102.32 v171.08,102
  Bottom 0.305: U$1.7 166.52,102.75 v166.98,102.29 | v96.47,26.12 96.39,26.19 MULTIPLEXER2.14 | MULTIPLEXER1.14 40.27,100.78 39.68,100.78 38.46,102 v38.05,102 | MULTIPLEXER.14 107.81,175.75 v107.9,175.66 | v171.08,102 168.86,99.77 v168.86,99.14
LS-1
  Bottom 0.305: LS1.E R1.2 174.74,104.85 | 174.74,104.85 C1.1 | MULTIPLEXER.19 103.15,170.8 103.5,171.15 128.66,171.15 139.45,181.94 144.16,181.94 181.05,145.05 181.05,142.29 181.19,142.15 181.19,129.02 177.56,125.39 177.56,118.95 173.67,115.07 173.67,110.53 173.52,110.38 173.52,108.96 173.85,108.64 174.18,108.64 174.58,108.24 174.58,105 174.74,104.85
LS-2
  Bottom 0.305: 179.69,115.3 179.2,115.78 178.47,115.78 178.43,115.74 177.71,115.74 177.2,116.24 177.2,116.96 178.07,117.82 178.07,125.17 181.7,128.81 181.7,142.36 181.56,142.5 181.56,146.67 149.25,178.97 147.9,178.97 144.42,182.45 139.24,182.45 128.45,171.66 103.29,171.66 102.64,171.01 102.64,170.35 MULTIPLEXER.20
  Bottom 0.508: LS2.E R2.2 179,114.61 179.69,115.3 180.55,116.16 180.55,116.51 C2.1
LS-3
  Bottom 0.305: MULTIPLEXER.21 101.99,170.35 101.99,171.08 103.08,172.17 128.24,172.17 139.03,182.96 144.63,182.96 148.11,179.48 149.46,179.48 182.83,146.11 182.83,136.18 189.19,129.82 190.25,129.82 | LS3.E 188.51,126.97 188.92,127.38 188.92,127.77 R3.2
  Bottom 0.508: R3.2 189.5,129.07 190.25,129.82 190.83,130.4 190.83,130.99 C3.1
LS-4
  Bottom 0.305: 191.12,143.29 190.25,143.29 189.5,142.53 187.13,142.53 149.67,179.99 148.32,179.99 144.84,183.47 138.82,183.47 128.03,172.68 102.87,172.68 101.34,171.15 101.34,170.35 MULTIPLEXER.22
  Bottom 0.508: LS4.E R4.2 191.12,143.29 C4.1
LS-5
  Bottom 0.305: MULTIPLEXER.23 100.69,170.35 100.69,171.22 102.66,173.18 127.82,173.18 138.61,183.98 145.05,183.98 148.53,180.5 149.88,180.5 178.98,151.4 184.59,151.4 185.38,152.19 186.37,152.19 186.45,152.12 186.45,152.06
  Bottom 0.508: LS5.E 186.45,152.06 R5.2 C5.1
LS-6
  Bottom 0.305: 179.25,162.58 178.04,162.58 177.18,161.72 169.38,161.72 150.09,181.01 148.74,181.01 145.26,184.48 138.4,184.48 127.61,173.69 102.45,173.69 99.9,171.14 MULTIPLEXER.24
  Bottom 0.508: LS6.E 179.25,162.58 R6.2 C6.1
LS-7
  Bottom 0.305: MULTIPLEXER.25 99.39,170.35 99.39,171.35 102.24,174.2 127.4,174.2 138.19,184.99 145.47,184.99 148.95,181.51 150.3,181.51 159.34,172.48 167.54,172.48 168.26,173.2 168.32,173.2 168.99,173.87
  Bottom 0.508: LS7.E R7.2 168.99,173.87 C7.1
LS-8
  Bottom 0.305: MULTIPLEXER.26 98.74,170.35 98.74,171.42 102.13,174.81 107.53,174.81 107.54,174.79 122.28,174.79 132.98,185.5 145.68,185.5 148.93,182.26 155.85,182.26 156.35,182.76 156.92,182.76 157.66,182.02 159.03,182.02
  Bottom 0.508: LS8.E R8.2 159.03,182.02 C8.1
LS-9
  Bottom 0.305: MULTIPLEXER.11 103.94,175.89 103.94,176.85 105,177.91 121.35,177.91 129.89,186.45 145.54,186.45 146.82,187.74 146.82,188.46 147.49,189.12
  Bottom 0.508: LS9.E R9.2 147.49,189.12 C9.1
LS-10
  Bottom 0.305: 135.91,194.26 135.91,193.19 121.14,178.42 104.63,178.42 103.15,176.94 MULTIPLEXER.10
  Bottom 0.508: LS10.E R10.2 135.91,194.26 C10.1
LS-11
  Bottom 0.305: MULTIPLEXER.9 102.64,175.89 102.64,177.15 118.29,192.8 121.87,192.8 123.44,194.37 123.44,195.61 123.47,195.64 123.47,197.94
  Bottom 0.508: LS11.E 125.36,197.25 R11.2 123.47,197.94 C11.1
LS-12
  Bottom 0.305: 110.74,199.94 110.74,185.97 101.99,177.22 101.99,175.89 MULTIPLEXER.8
  Bottom 0.508: LS12.E R12.2 110.74,199.94 C12.1
LS-13
  Bottom 0.305: MULTIPLEXER.7 101.34,175.89 101.34,177.29 104.72,180.67 104.72,194.39 100.59,198.52 100.59,200.28
  Bottom 0.508: LS13.E 100.59,200.28 R13.2 C13.1
LS-14
  Bottom 0.305: MULTIPLEXER.6 100.55,183.01 87.7,195.86 87.7,197.61 87.57,197.74 87.57,199.25
  Bottom 0.508: LS14.E 87.57,199.25 R14.2 C14.1
LS-15
  Bottom 0.305: 75.2,196.6 75.96,195.85 75.96,195.01 81.15,189.82 86.49,189.82 99.76,176.55 99.76,175.89 MULTIPLEXER.5
  Bottom 0.508: LS15.E 75.2,196.6 R15.2 C15.1
LS-16
  Bottom 0.305: MULTIPLEXER.4 99.11,175.89 99.11,176.48 86.28,189.31 64.4,189.31 63.55,190.16 63.18,190.99 63.18,192.35
  Bottom 0.508: LS16.E 63.18,192.35 R16.2 C16.1
LS-17
  Bottom 0.305: 49.09,184.98 50.75,183.32 50.75,175.34 44.27,168.86 44.27,168.78 27.83,152.33 27.83,149.97 21.59,143.74 21.59,137.44 32.68,126.35 36.9,126.35 39.47,123.78 39.47,106.24 36.68,103.45 36.1,103.45 35.9,103.24 MULTIPLEXER1.19
  Bottom 0.508: LS17.E R17.2 49.09,184.98 C17.1
LS-18
  Bottom 0.305: 39.16,177.75 40.52,176.39 40.52,176.32 43.77,173.08 43.77,168.99 27.32,152.54 27.32,150.18 21.08,143.95 21.08,137.23 32.47,125.84 36.69,125.84 38.96,123.57 38.96,106.45 36.47,103.95 35.89,103.95 35.83,103.89 MULTIPLEXER1.20
  Bottom 0.508: LS18.E R18.2 39.16,177.75 C18.1
LS-19
  Bottom 0.305: 29.53,168.62 33.6,164.55 33.6,159.55 26.81,152.75 26.81,150.39 20.57,144.16 20.57,137.02 32.26,125.33 36.48,125.33 38.45,123.36 38.45,106.66 36.48,104.68 35.01,104.68 MULTIPLEXER1.21
  Bottom 0.508: LS19.E R19.2 29.53,168.62 C19.1
LS-20
  Bottom 0.305: MULTIPLEXER1.22 36.15,105.19 37.95,106.99 37.95,123.15 36.27,124.82 32.05,124.82 20.07,136.81 20.07,144.37 26.3,150.6 26.3,154.06 21.47,158.89
  Bottom 0.508: LS20.E R20.2 21.47,158.89 20.27,157.56 C20.1
LS-21
  Bottom 0.305: 14.75,147.62 15.93,147.62 16.85,146.69 16.85,145.75 16.55,145.45 16.55,144.87 19.56,141.86 19.56,136.6 31.84,124.31 36.06,124.31 37.44,122.94 37.44,107.26 36.02,105.84 MULTIPLEXER1.23
  Bottom 0.508: C21.1 14.75,147.62 R21.2 LS21.E
LS-22
  Bottom 0.305: 9.61,136.04 10.8,136.04 11.25,135.59 19.85,135.59 31.63,123.81 35.85,123.81 36.93,122.73 36.93,107.47 35.95,106.49 MULTIPLEXER1.24
  Bottom 0.508: LS22.E R22.2 9.61,136.04 C22.1
LS-23
  Bottom 0.305: 5.86,123.3 35.64,123.3 36.42,122.52 36.42,107.68 35.88,107.14 MULTIPLEXER1.25
  Bottom 0.508: C23.1 5.86,123.3 R23.2 LS23.E
LS-24
  Bottom 0.305: 4.19,113.14 34.92,113.14 35.91,112.15 35.91,108.24 35.46,107.79 MULTIPLEXER1.26
  Bottom 0.508: LS24.E 4.19,113.14 R24.2 C24.1
LS-25
  Bottom 0.305: LS25.E | MULTIPLEXER1.11 40.55,102.45 41.14,102.45 41.35,102.24 41.35,100.26 38.92,97.83 4.68,97.83 4.49,97.64 3.62,97.64
  Bottom 0.508: LS25.E R25.2 3.61,97.86 3.62,97.64 C25.1
LS-26
  Bottom 0.305: MULTIPLEXER1.10 41.07,103.24 41.86,102.45 41.86,100.05 30.24,88.43 5,88.43 4.58,88.01
  Bottom 0.508: LS26.E 4.58,88.01 R26.2 C26.1
LS-27
  Bottom 0.305: MULTIPLEXER1.9 40.55,103.75 41.28,103.75 42.36,102.66 42.36,99.84 18.8,76.28 8.81,76.28 8.61,76.09 7.65,76.09 7.19,75.63
  Bottom 0.508: LS27.E 7.19,75.63 R27.2 C27.1
LS-28
  Bottom 0.305: MULTIPLEXER1.8 40.55,104.4 41.35,104.4 42.87,102.87 42.87,99.63 19.51,76.27 19.51,70.23 12.87,63.59 11.41,63.59
  Bottom 0.508: LS28.E 11.41,63.59 R28.2 C28.1
LS-29
  Bottom 0.305: 17.36,51.8 18.25,52.69 18.38,52.69 20.02,54.33 20.02,76.06 43.38,99.42 43.38,103.08 41.41,105.05 40.55,105.05 MULTIPLEXER1.7
  Bottom 0.508: C29.1 R29.2 16.94,51.68 | 16.94,51.68 16.78,51.84 LS29.E | 17.36,51.8 17.24,51.68 16.94,51.68
LS-30
  Bottom 0.305: MULTIPLEXER1.6 40.55,105.7 41.48,105.7 43.89,103.29 43.89,99.21 20.52,75.85 20.52,59.03 27.87,51.69 27.87,40.64 26.33,39.1 26.27,39.1
  Bottom 0.508: LS30.E R30.2 26.27,39.1 C30.1
LS-31
  Bottom 0.305: 33.32,31.55 33.32,32.38 34.38,33.44 34.38,45.9 21.03,59.24 21.03,75.64 44.4,99 44.4,103.5 41.41,106.49 MULTIPLEXER1.5
  Bottom 0.508: LS31.E 33.32,31.55 R31.2 35.09,29.81 C31.1
LS-32
  Bottom 0.305: 42.9,23.37 43.9,24.37 43.9,25.47 43.77,25.61 43.77,37.23 21.54,59.45 21.54,75.43 44.9,98.79 44.9,103.71 41.48,107.14 MULTIPLEXER1.4
  Bottom 0.508: LS32.E 42.9,23.37 R32.2 C32.1
LS-33
  Bottom 0.305: MULTIPLEXER2.19 98.85,33.22 98.85,32.63 98.54,32.32 72.97,32.32 57.18,16.53 57.18,16.17 56,14.99
  Bottom 0.508: LS33.E R33.2 56,14.99 57.73,14.05 C33.1
LS-34
  Bottom 0.305: 65.31,10.77 66.32,11.78 66.32,13.51 84.62,31.81 98.75,31.81 99.5,32.56 99.5,33.22 MULTIPLEXER2.20
  Bottom 0.508: LS34.E 65.31,10.77 R34.2 C34.1
LS-35
  Bottom 0.305: MULTIPLEXER2.21 100.15,33.22 100.15,32.49 98.96,31.3 84.83,31.3 80.57,27.04 80.57,5.99
  Bottom 0.508: C35.1 80.57,5.99 R35.2 LS35.E
LS-36
  Bottom 0.305: MULTIPLEXER2.22 100.8,33.22 100.8,32.43 99.17,30.8 93.35,30.8 91.9,29.35 91.9,7.32 92.69,6.52 92.69,4.38 92.37,4.06
  Bottom 0.508: LS36.E 90.46,4.36 | 92.37,4.06 90.46,4.36 | 90.46,4.36 R36.2 C36.1
LS-37
  Bottom 0.305: 103.14,3.71 102.62,4.23 102.62,6.58 101.69,7.51 98.48,7.51 92.41,13.59 92.41,29.14 93.56,30.29 99.38,30.29 101.59,32.5 MULTIPLEXER2.23
  Bottom 0.508: LS37.E 103.14,3.71 R37.2 C37.1
LS-38
  Bottom 0.305: MULTIPLEXER2.24 102.1,33.22 102.1,32.29 99.59,29.78 95.67,29.78 92.91,27.02 92.91,13.8 98.69,8.02 111.71,8.02 112.34,8.65 117.07,8.65 118.58,7.14 118.58,5.24 118.7,5.11
  Bottom 0.508: LS38.E R38.2 118.7,5.11 C38.1
LS-39
  Bottom 0.305: MULTIPLEXER2.25 102.75,33.22 102.75,32.22 99.81,29.27 95.88,29.27 93.42,26.81 93.42,21.23 98.06,16.59 120.87,16.59 127.63,9.83 127.63,8.76 128.91,7.48
  Bottom 0.508: LS39.E 128.91,7.48 R39.2 C39.1
LS-40
  Bottom 0.305: 140.83,11.75 139.53,13.05 139.53,13.26 135.69,17.1 98.27,17.1 93.93,21.44 93.93,26.6 96.09,28.76 100.02,28.76 103.4,32.15 103.4,33.22 MULTIPLEXER2.26
  Bottom 0.508: LS40.E 140.83,11.75 R40.2 C40.1
LS-41
  Bottom 0.305: 152.31,17.62 152.31,18.24 151.53,19.02 151.53,19.31 151.28,19.57 148.29,19.57 146.33,17.61 104.95,17.61 98.6,23.96 98.6,26.47 98.34,26.73 MULTIPLEXER2.11
  Bottom 0.508: LS41.E 152.31,17.62 R41.2 C41.1
LS-42
  Bottom 0.305: 162.6,24.72 162.45,24.72 160.89,26.27 160.45,26.27 159.97,26.75 158.06,26.75 155.84,24.53 152.53,24.53 146.12,18.11 105.17,18.11 99.11,24.17 99.11,26.68 98.99,26.8 MULTIPLEXER2.10
  Bottom 0.508: LS42.E 162.6,24.72 R42.2 C42.1
LS-43
  Bottom 0.305: 172.32,33.45 169.81,35.96 166.96,35.96 160.29,29.29 156.58,29.29 145.91,18.62 105.38,18.62 99.64,24.35 MULTIPLEXER2.9
  Bottom 0.508: LS43.E 172.32,33.45 R43.2 C43.1
LS-44
  Bottom 0.305: 180.65,43.22 179.03,44.85 171.42,44.85 145.7,19.13 105.59,19.13 100.29,24.42 MULTIPLEXER2.8
  Bottom 0.508: C44.1 R44.2 180.65,43.22 LS44.E
LS-45
  Bottom 0.305: 187.66,54.02 186.72,54.95 186.62,55.01 180.86,55.01 145.49,19.64 105.8,19.64 100.94,24.49 MULTIPLEXER2.7
  Bottom 0.508: LS45.E 187.66,54.02 R45.2 C45.1
LS-46
  Bottom 0.305: 193,65.48 192,65.48 191.6,65.88 188.99,65.88 188.73,65.62 188.73,65.35 187.78,64.41 187.78,62.65 145.28,20.15 106.01,20.15 101.74,24.42 101.74,27.68 MULTIPLEXER2.6
  Bottom 0.508: R46.2 193.49,66.94 | 193.49,66.94 193.29,67.15 193.29,67.84 192.04,69.08 C46.1 | LS46.E 193,65.48 193.49,66.94
LS-47
  Bottom 0.305: MULTIPLEXER2.5 102.39,27.68 102.39,24.48 106.22,20.65 145.07,20.65 187.27,62.86 187.27,73.11 184.93,75.45 184.93,79.01 185.99,80.07
  Bottom 0.508: LS47.E 187.73,79.26 187.73,79.67 187.23,80.16 185.9,80.16 | 185.99,80.07 185.9,80.16 | 185.9,80.16 R47.2 C47.1
LS-48
  Bottom 0.305: MULTIPLEXER2.4 103.04,27.68 103.04,24.55 106.43,21.16 144.86,21.16 184.42,60.72 184.42,77.55 174.57,87.39 174.57,91.2 175.3,91.92 175.75,91.92 175.81,91.99 177.57,91.99
  Bottom 0.508: LS48.E 178.71,91 178.71,91.18 178.44,91.45 178.16,91.45 177.57,91.99 R48.2 C48.1
LSOUT  (via drill 0.51)
  Top 0.305: v98.69,167.72 100.19,166.22 118.07,166.22 134.44,182.59 144.55,182.59 181.75,145.39 181.75,129.58 169.91,117.74 169.91,106.54 v167.52,104.15
  Bottom 0.305: U$1.8 167.12,103.75 v167.52,104.15 | MULTIPLEXER.28 97.3,169.11 v98.69,167.72
LSOUT2  (via drill 0.51)
  Top 0.305: v34.87,110.57 34.87,127.72 21.86,140.73 21.86,143.27 60.91,182.33 64.4,182.33 81.23,165.5 118.06,165.5 134.25,181.69 144.73,181.69 181.24,145.18 181.24,129.94 169.41,118.1 169.41,107.62 v167.59,105.81
  Bottom 0.305: U$1.9 166.54,104.75 v167.59,105.81 | v34.87,110.57 MULTIPLEXER1.28
LSOUT3  (via drill 0.51)
  Top 0.305: v124.09,22.31 126,20.4 145.68,20.4 183.15,57.86 183.15,60.93 183.22,61 183.22,65.09 169.81,78.5 169.81,100.68 167.2,103.29 167.16,103.29 166.66,103.79 166.66,105.15 v166.19,105.62
  Bottom 0.305: U$1.10 166.05,105.76 v166.19,105.62 | v124.09,22.31 123.37,23.03 115.18,23.03 MULTIPLEXER2.28
N$1
  Bottom 0.305: D1.A R-1.1
N$2
  Bottom 0.508: R-2.1 184.92,122.22 184.92,121.78 184.6,121.46 184.31,121.46 D2.A
N$3
  Bottom 0.508: R-3.1 D3.A
N$4
  Bottom 0.508: D4.A R-4.1
N$5
  Bottom 0.508: D5.A R-5.1
N$6
  Bottom 0.508: D6.A R-6.1
N$7
  Bottom 0.508: D7.A R-7.1
N$8
  Bottom 0.508: D8.A R-8.1
N$9
  Bottom 0.508: D9.A R-9.1
N$10
  Bottom 0.508: D10.A R-10.1
N$11
  Bottom 0.508: D11.A R-11.1
N$12
  Bottom 0.508: D12.A R-12.1
N$13
  Bottom 0.508: D13.A R-13.1
N$14
  Bottom 0.508: D14.A R-14.1
N$15
  Bottom 0.508: D15.A R-15.1
N$16
  Bottom 0.508: D16.A R-16.1
N$19
  Bottom 0.508: D17.A R-17.1
N$22
  Bottom 0.508: D18.A R-18.1
N$23
  Bottom 0.508: D19.A R-19.1
N$24
  Bottom 0.508: D20.A R-20.1
N$25
  Bottom 0.508: D21.A R-21.1
N$26
  Bottom 0.508: D22.A R-22.1
N$27
  Bottom 0.508: D23.A R-23.1
N$28
  Bottom 0.508: D24.A R-24.1
N$29
  Bottom 0.508: D25.A R-25.1
N$30
  Bottom 0.508: D26.A R-26.1
N$31
  Bottom 0.508: D27.A R-27.1
N$32
  Bottom 0.508: D33.A R-33.1
N$33
  Bottom 0.508: D34.A R-34.1
N$34
  Bottom 0.508: D35.A R-35.1
N$35
  Bottom 0.508: D36.A R-36.1
N$36
  Bottom 0.508: D37.A R-37.1
N$37
  Bottom 0.508: D28.A R-28.1
N$38
  Bottom 0.508: D29.A R-29.1
N$39
  Bottom 0.508: D30.A R-30.1
N$40
  Bottom 0.508: D31.A R-31.1
N$41
  Bottom 0.508: D32.A R-32.1
N$46
  Bottom 0.508: D38.A R-38.1
N$47
  Bottom 0.508: D39.A R-39.1
N$48
  Bottom 0.508: D40.A R-40.1
N$49
  Bottom 0.508: D41.A R-41.1
N$50
  Bottom 0.508: D42.A R-42.1
N$51
  Bottom 0.508: D43.A R-43.1
N$52
  Bottom 0.508: D44.A R-44.1
N$53
  Bottom 0.508: D45.A R-45.1
N$54
  Bottom 0.508: D46.A 191.5,73.44 190.45,75.2 R-46.1
N$55
  Bottom 0.508: D47.A 180.57,87.31 180.57,87.33 179.64,88.26 R-47.1
N$56
  Bottom 0.508: D48.A R-48.1
(copper drawn outside any net)
  shapes: Top area x13

## Text on the board
tNames: AURORA / Max Rodman / Solomon Hawkings / Dominic Beachamp